# EAGLE board nc7wp14-breakout (EAGLE 5.10)
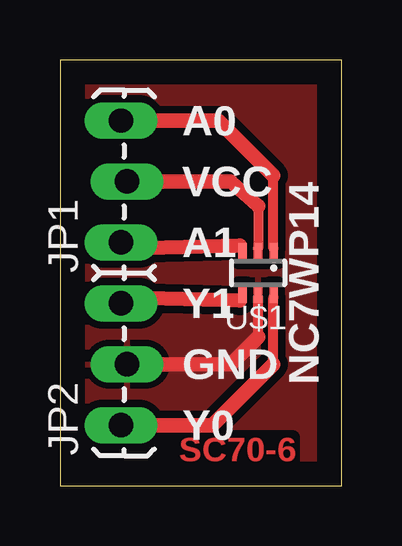
[diagram p0: board, top side]

Size 11.73 x 17.77 mm. Coordinates in mm from the lower left corner, seen from the top.
Outline: 0,0 11.73,0 11.73,17.77 0,17.77 0,0
Copper layers (1*16): Top 0.035mm / dielectric 1.5mm / Bottom 0.035mm
Design rules "default": minimum track width 10mil, minimum drill 24mil, track to track 8mil, track to pad 8mil, pad to pad 8mil, via to via 8mil, smd to smd 8mil, copper to edge 40mil, drill to drill 8mil, minimum pad ring 10mil, minimum via ring 8mil, stop-mask expansion 4mil, vias tented up to drill 0mil, thermal gap 10mil

## Footprints (pad centres in the part's own frame; a part is rotated, then mirrored left to right if it is on the bottom)
1X03_LOCK_LONGPADS = drill 1.016 long: 1 0,0; 2 2.54,-0.254; 3 5.08,0
SC70-6L = smd 0.35 x 0.8: 1 -0.65,-0.85; 2 0,-0.85; 3 0.65,-0.85; 4 0.65,0.85; 5 0,0.85; 6 -0.65,0.85

## Placement (x,y rotation side)
JP1  [1X03_LOCK_LONGPADS]  2.54,10.16 90 top
JP2  [1X03_LOCK_LONGPADS]  2.54,2.54 90 top
U$1  NC7WP14P6X  [SC70-6L]  8.25,8.89 180 top

## Library data of the parts
JP1 JP2 = SparkFun
U$1 = ideabot

## Nets
GND: JP2.2 U$1.5
N$1: JP1.1 U$1.3
N$2: JP1.2 U$1.2
N$3: JP1.3 U$1.1
N$4: JP2.3 U$1.4
N$6: JP2.1 U$1.6

## Tracks (layer width: path | path; a pad name or v marks a point on that pad's centre or on a via)
GND
  Top 0.254: 8.25,7.87 U$1.5
  Top 0.406: 8.25,6.22 8.25,7.87
  Top 0.61: 8.25,6.22 7.11,5.08 JP2.2
  pour Top (isolate 0.305): -1.02,17.78 -1.14,0 11.43,0 11.43,17.78
N$1
  Top 0.254: JP1.1 2.79,9.91 | 7.49,10.03 U$1.3
  Top 0.61: 2.79,9.91 7.49,10.03
N$2
  Top 0.254: 8.25,9.91 U$1.2
  Top 0.406: 8.25,11.68 8.25,9.91
  Top 0.61: 8.25,11.68 7.11,12.7 JP1.2
N$3
  Top 0.254: U$1.1 8.89,9.91
  Top 0.406: 8.89,9.91 8.89,12.95
  Top 0.61: 8.89,12.95 6.6,15.24 JP1.3
N$4
  Top 0.254: JP2.3 2.79,7.87 | 7.49,7.75 U$1.4
  Top 0.61: 2.79,7.87 7.49,7.75
N$6
  Top 0.254: 8.89,7.87 U$1.6
  Top 0.406: 8.89,5.08 8.89,7.87
  Top 0.61: 8.89,5.08 6.35,2.54 JP2.1

## Text on the board
Top: SC70-6
tPlace: A0 | NC7WP14 | VCC | A1 | Y1 | GND | Y0